# EAGLE board sterownik_led do druku (EAGLE 9.5.2)
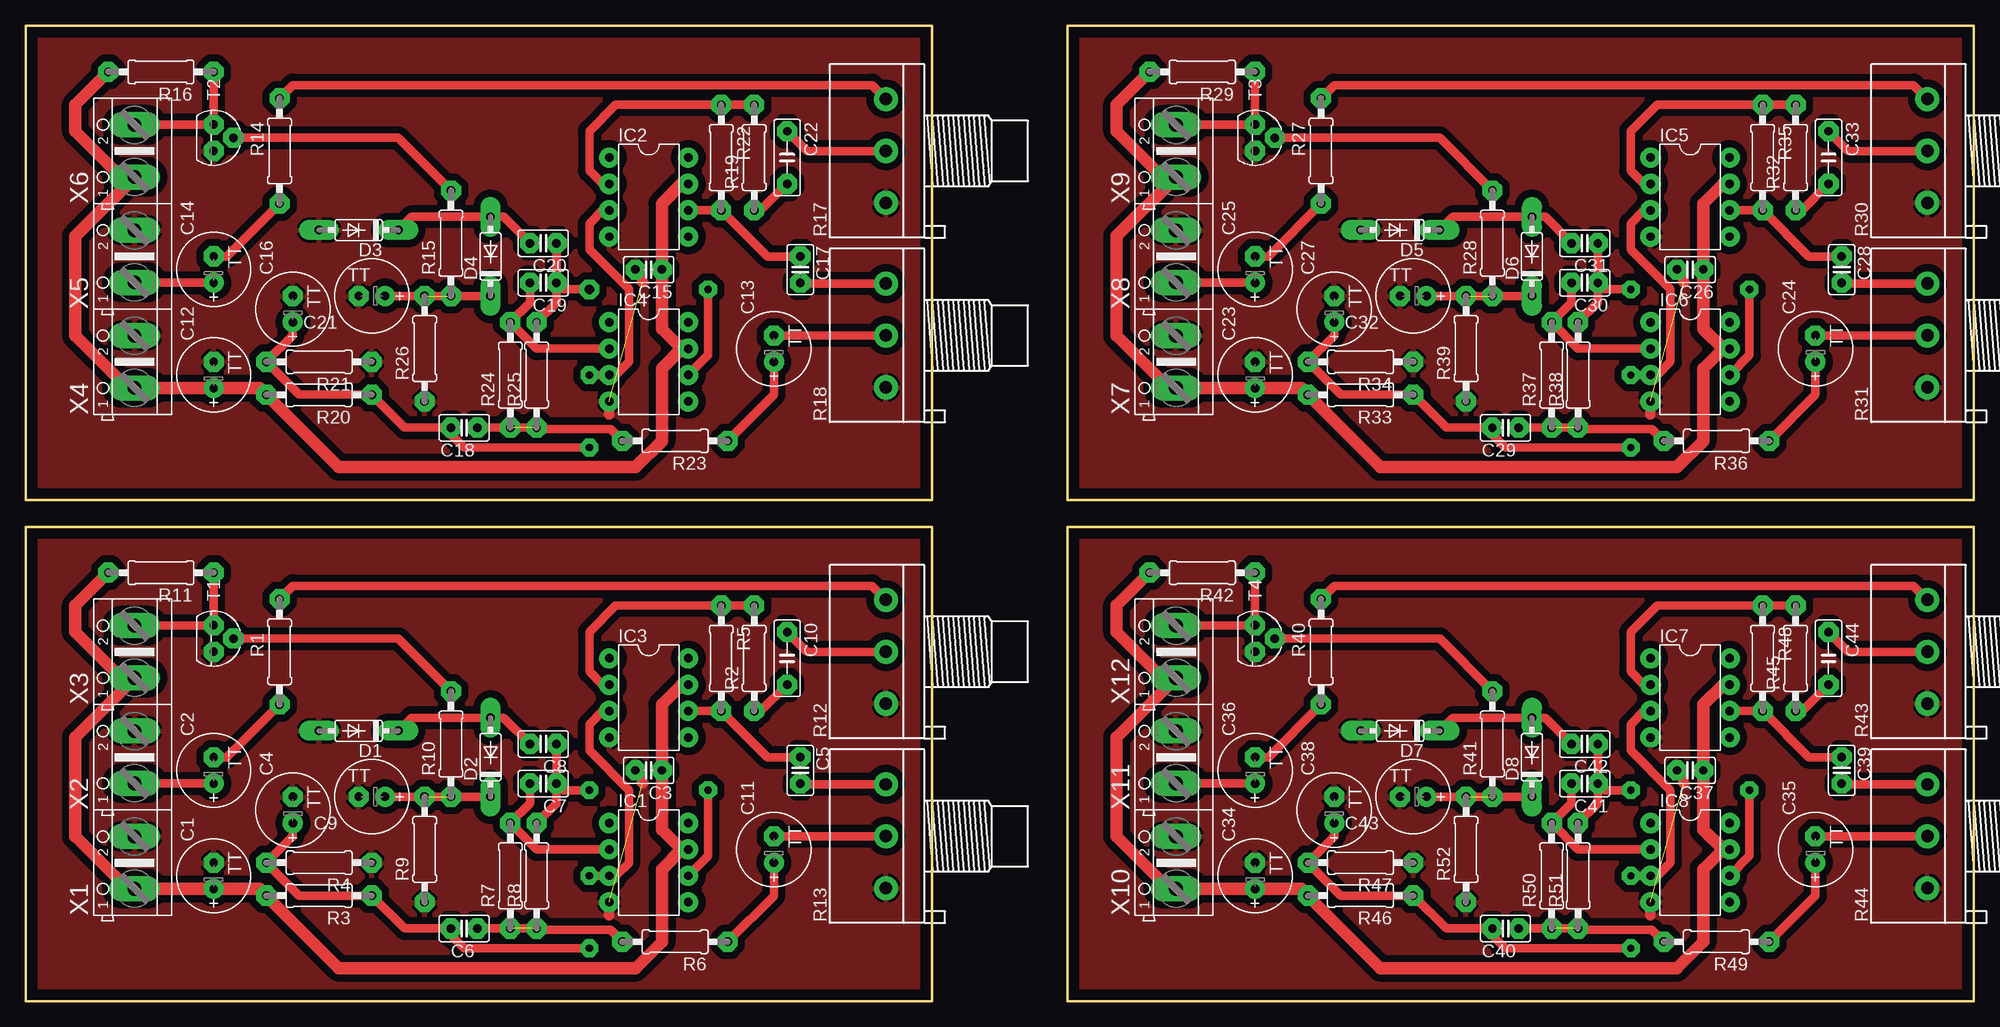
[diagram p0: board, top side]
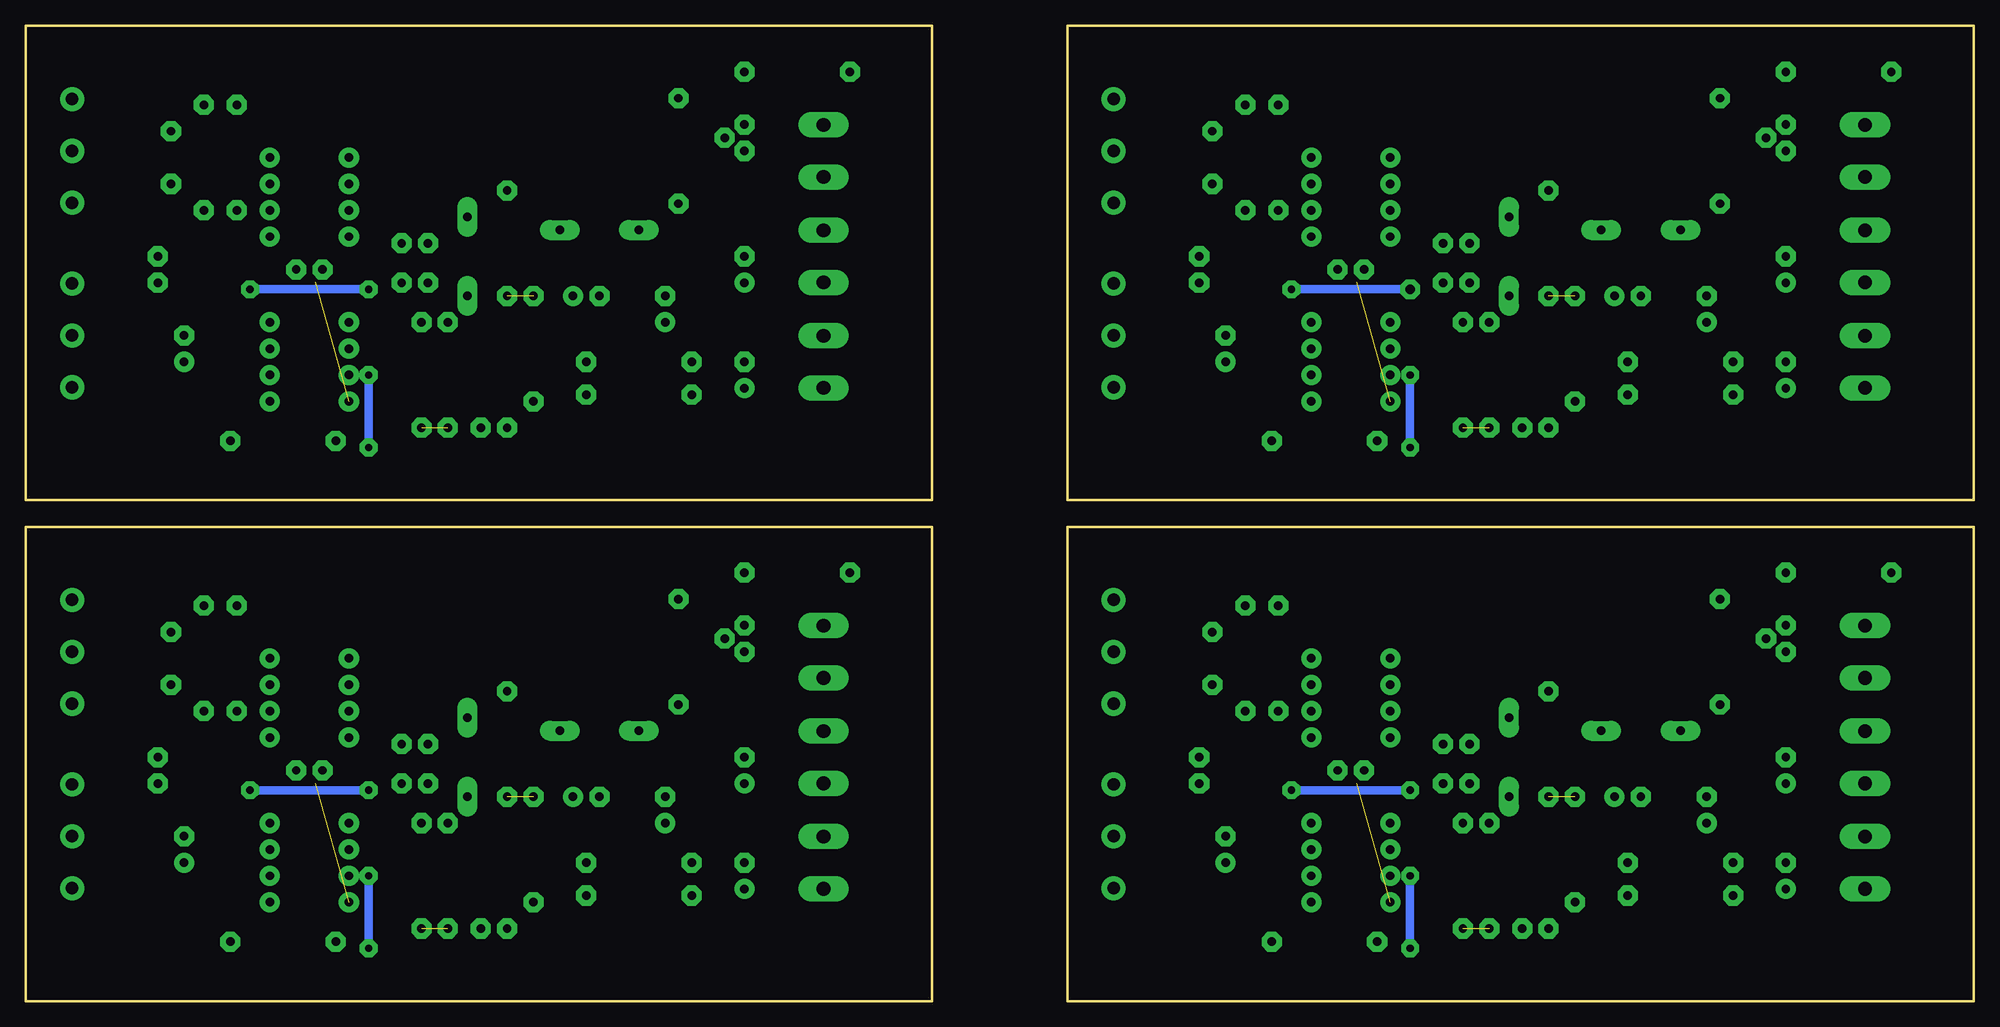
[diagram p1: board, bottom side, seen from below]

Size 187.63 x 93.96 mm. Coordinates in mm from the lower left corner, seen from the top.
Outline: 87.3,0 87.3,45.7 0,45.7 0,0 87.3,0
Outline: 87.3,48.26 87.3,93.96 0,93.96 0,48.26 87.3,48.26
Outline: 187.63,48.26 187.63,93.96 100.33,93.96 100.33,48.26 187.63,48.26
Outline: 187.63,0 187.63,45.7 100.33,45.7 100.33,0 187.63,0
Copper layers (1*16): Top 0.035mm / dielectric 1.5mm / Bottom 0.035mm
Design rules "default *": minimum track width 6mil, minimum drill 0.35mm, track to track 6mil, track to pad 6mil, pad to pad 6mil, via to via 6mil, smd to smd 6mil, copper to edge 40mil, drill to drill 6mil, minimum pad ring 22mil, minimum via ring 20mil, stop-mask expansion 4mil, vias tented up to drill 0mil, thermal gap 10mil

## Footprints (pad centres in the part's own frame; a part is rotated, then mirrored left to right if it is on the bottom)
TT2D7 = drill 0.813: + -1.27,0 | drill 0.813 octagon: - 1.27,0
C025-025X050 = drill 0.813 octagon: 1 -1.27,0; 2 1.27,0
C050-025X075 = drill 0.813 octagon: 1 -2.54,0; 2 2.54,0
DO35-7 = drill 0.813 long: A 3.81,0; C -3.81,0
DIL08 = drill 0.813 pad 1.27: 1 -3.81,-3.81; 2 -1.27,-3.81; 3 1.27,-3.81; 4 3.81,-3.81; 5 3.81,3.81; 6 1.27,3.81; 7 -1.27,3.81; 8 -3.81,3.81
0207/10 = drill 0.813 octagon: 1 -5.08,0; 2 5.08,0
3RP/1610N = drill 1.2 pad 2.184: 1 -5,0; 2 0,0; 3 5,0
TO92 = drill 0.813 octagon: 1 1.27,0; 2 0,1.905; 3 -1.27,0
AK500/2 = drill 1.321 long: 1 -2.515,0; 2 2.515,0

## Placement (x,y rotation side)
C1  470n  [TT2D7]  18.09,12.06 90 top
C2  10u  [TT2D7]  18.09,22.23 90 top
C3  100n  [C025-025X050]  60,22.23 180 top
C4  10u  [TT2D7]  25.71,18.41 90 top
C5  1u  [C025-025X050]  74.6,22.23 270 top
C6  150n  [C025-025X050]  42.22,6.99 180 top
C7  11n  [C025-025X050]  49.84,20.95 180 top
C8  2.2u  [C025-025X050]  49.84,24.77 180 top
C9  10u  [TT2D7]  33.33,19.68 180 top
C10  10u  [C050-025X075]  73.33,33.02 270 top
C11  470n  [TT2D7]  72.06,14.61 90 top
C12  470n  [TT2D7]  18.09,60.33 90 top
C13  470n  [TT2D7]  72.06,62.87 90 top
C14  10u  [TT2D7]  18.09,70.48 90 top
C15  100n  [C025-025X050]  60,70.48 180 top
C16  10u  [TT2D7]  25.71,66.67 90 top
C17  1u  [C025-025X050]  74.6,70.48 270 top
C18  150n  [C025-025X050]  42.22,55.24 180 top
C19  11n  [C025-025X050]  49.84,69.22 180 top
C20  2.2u  [C025-025X050]  49.84,73.03 180 top
C21  10u  [TT2D7]  33.33,67.94 180 top
C22  10u  [C050-025X075]  73.33,81.28 270 top
C23  470n  [TT2D7]  118.42,60.33 90 top
C24  470n  [TT2D7]  172.39,62.87 90 top
C25  10u  [TT2D7]  118.42,70.48 90 top
C26  100n  [C025-025X050]  160.32,70.48 180 top
C27  10u  [TT2D7]  126.03,66.67 90 top
C28  1u  [C025-025X050]  174.93,70.48 270 top
C29  150n  [C025-025X050]  142.54,55.24 180 top
C30  11n  [C025-025X050]  150.16,69.22 180 top
C31  2.2u  [C025-025X050]  150.16,73.03 180 top
C32  10u  [TT2D7]  133.66,67.94 180 top
C33  10u  [C050-025X075]  173.66,81.28 270 top
C34  470n  [TT2D7]  118.42,12.06 90 top
C35  470n  [TT2D7]  172.39,14.61 90 top
C36  10u  [TT2D7]  118.42,22.23 90 top
C37  100n  [C025-025X050]  160.32,22.23 180 top
C38  10u  [TT2D7]  126.03,18.41 90 top
C39  1u  [C025-025X050]  174.93,22.23 270 top
C40  150n  [C025-025X050]  142.54,6.99 180 top
C41  11n  [C025-025X050]  150.16,20.95 180 top
C42  2.2u  [C025-025X050]  150.16,24.77 180 top
C43  10u  [TT2D7]  133.66,19.68 180 top
C44  10u  [C050-025X075]  173.66,33.02 270 top
D1  1N4148DO35-7  [DO35-7]  32.05,26.04 180 top
D2  1N4148DO35-7  [DO35-7]  44.76,23.5 90 top
D3  1N4148DO35-7  [DO35-7]  32.05,74.3 180 top
D4  1N4148DO35-7  [DO35-7]  44.76,71.75 90 top
D5  1N4148DO35-7  [DO35-7]  132.38,74.3 180 top
D6  1N4148DO35-7  [DO35-7]  145.08,71.75 90 top
D7  1N4148DO35-7  [DO35-7]  132.38,26.04 180 top
D8  1N4148DO35-7  [DO35-7]  145.08,23.5 90 top
IC1  TL081P  [DIL08]  60,13.34 270 top
IC2  TL081P  [DIL08]  60,77.47 270 top
IC3  TL081P  [DIL08]  60,29.21 270 top
IC4  TL081P  [DIL08]  60,61.59 270 top
IC5  TL081P  [DIL08]  160.32,77.47 270 top
IC6  TL081P  [DIL08]  160.32,61.59 270 top
IC7  TL081P  [DIL08]  160.32,29.21 270 top
IC8  TL081P  [DIL08]  160.32,13.34 270 top
R1  470  [0207/10]  24.44,33.66 90 top
R2  2k2  [0207/10]  70.16,33.02 90 top
R3  1k  [0207/10]  28.25,10.16 180 top
R4  1k  [0207/10]  28.25,13.34 180 top
R5  100k  [0207/10]  66.98,33.02 270 top
R6  77k  [0207/10]  62.54,5.71 180 top
R7  38.4k  [0207/10]  46.66,12.06 90 top
R8  80.6k  [0207/10]  49.2,12.06 90 top
R9  5.6k  [0207/10]  38.41,14.61 90 top
R10  5.6k  [0207/10]  40.95,24.77 90 top
R11  10k  [0207/10]  13.01,41.27 180 top
R12  4.7k  [3RP/1610N]  82.86,33.66 90 top
R13  4.7k  [3RP/1610N]  82.86,15.88 90 top
R14  470  [0207/10]  24.44,81.92 90 top
R15  5.6k  [0207/10]  40.95,73.03 90 top
R16  10k  [0207/10]  13.01,89.53 180 top
R17  4.7k  [3RP/1610N]  82.86,81.92 90 top
R18  4.7k  [3RP/1610N]  82.86,64.14 90 top
R19  2k2  [0207/10]  70.16,81.28 90 top
R20  1k  [0207/10]  28.25,58.42 180 top
R21  1k  [0207/10]  28.25,61.59 180 top
R22  100k  [0207/10]  66.98,81.28 270 top
R23  77k  [0207/10]  62.54,53.98 180 top
R24  38.4k  [0207/10]  46.66,60.33 90 top
R25  80.6k  [0207/10]  49.2,60.33 90 top
R26  5.6k  [0207/10]  38.41,62.87 90 top
R27  470  [0207/10]  124.77,81.92 90 top
R28  5.6k  [0207/10]  141.27,73.03 90 top
R29  10k  [0207/10]  113.34,89.53 180 top
R30  4.7k  [3RP/1610N]  183.18,81.92 90 top
R31  4.7k  [3RP/1610N]  183.18,64.14 90 top
R32  2k2  [0207/10]  170.48,81.28 90 top
R33  1k  [0207/10]  128.57,58.42 180 top
R34  1k  [0207/10]  128.57,61.59 180 top
R35  100k  [0207/10]  167.31,81.28 270 top
R36  77k  [0207/10]  162.86,53.98 180 top
R37  38.4k  [0207/10]  146.99,60.33 90 top
R38  80.6k  [0207/10]  149.53,60.33 90 top
R39  5.6k  [0207/10]  138.73,62.87 90 top
R40  470  [0207/10]  124.77,33.66 90 top
R41  5.6k  [0207/10]  141.27,24.77 90 top
R42  10k  [0207/10]  113.34,41.27 180 top
R43  4.7k  [3RP/1610N]  183.18,33.66 90 top
R44  4.7k  [3RP/1610N]  183.18,15.88 90 top
R45  2k2  [0207/10]  170.48,33.02 90 top
R46  1k  [0207/10]  128.57,10.16 180 top
R47  1k  [0207/10]  128.57,13.34 180 top
R48  100k  [0207/10]  167.31,33.02 270 top
R49  77k  [0207/10]  162.86,5.71 180 top
R50  38.4k  [0207/10]  146.99,12.06 90 top
R51  80.6k  [0207/10]  149.53,12.06 90 top
R52  5.6k  [0207/10]  138.73,14.61 90 top
T1  BC547  [TO92]  18.09,34.92 270 top
T2  BC547  [TO92]  18.09,83.19 270 top
T3  BC547  [TO92]  118.42,83.19 270 top
T4  BC547  [TO92]  118.42,34.92 270 top
X1  [AK500/2]  10.46,13.34 90 top
X2  [AK500/2]  10.46,23.5 90 top
X3  [AK500/2]  10.46,33.66 90 top
X4  [AK500/2]  10.46,61.59 90 top
X5  [AK500/2]  10.46,71.75 90 top
X6  [AK500/2]  10.46,81.92 90 top
X7  [AK500/2]  110.8,61.59 90 top
X8  [AK500/2]  110.8,71.75 90 top
X9  [AK500/2]  110.8,81.92 90 top
X10  [AK500/2]  110.8,13.34 90 top
X11  [AK500/2]  110.8,23.5 90 top
X12  [AK500/2]  110.8,33.66 90 top

## Library data of the parts
C1-C44 = rcl; SPICEPREFIX: C
D1-D8 = diode
IC1-IC8 = linear
R1-R11 R14-R16 R19-R29 R32-R42 R45-R52 = rcl; SPICEPREFIX: R
R12 R13 R17 R18 R30 R31 R43 R44 = pot
T1-T4 = transistor
X1-X12 = con-ptr500; OC_FARNELL: unknown; OC_NEWARK: unknown

## Nets
0: C1.- C3.2 C4.- C9.- D1.A IC1.4 IC3.4 R4.1 R9.1 R12.1 R13.1 T1.1 X1.2 X2.2
1: C12.- C15.2 C16.- C21.- D3.A IC2.4 IC4.4 R17.1 R18.1 R21.1 R26.1 T2.1 X4.2 X5.2
2: C23.- C26.2 C27.- C32.- D5.A IC5.4 IC6.4 R30.1 R31.1 R34.1 R39.1 T3.1 X7.2 X8.2
3: C34.- C37.2 C38.- C43.- D7.A IC7.4 IC8.4 R43.1 R44.1 R47.1 R52.1 T4.1 X10.2 X11.2
JACK_VIN: C2.+ X2.1
JACK_VIN1: C14.+ X5.1
JACK_VIN2: C25.+ X8.1
JACK_VIN3: C36.+ X11.1
N$1: C4.+ C6.2 IC1.3 IC3.3 R3.1 R4.2
N$2: R10.2 T1.2
N$3: C10.1 R12.2
N$4: C2.- R1.1
N$5: R1.2 R12.3
N$6: C7.2 IC1.2 R7.2
N$7: C14.- R14.1
N$8: C11.- R13.2
N$9: C5.1 IC3.6 R5.2
N$10: C6.1 R6.2 R7.1 R8.1
N$11: C17.1 IC2.6 R22.2
N$12: C7.1 C8.1 IC1.6 R8.2
N$13: C18.1 R23.2 R24.1 R25.1
N$14: C20.2 D3.C D4.A
N$15: C21.+ D4.C R15.1 R26.2
N$16: C8.2 D1.C D2.A
N$17: C9.+ D2.C R9.2 R10.1
N$18: C5.2 R13.3
N$19: C10.2 R2.1
N$20: C11.+ R6.1
N$21: IC3.2 R2.2 R5.1
N$22: R15.2 T2.2
N$23: R14.2 R17.3
N$24: C22.2 R19.1
N$25: C17.2 R18.3
N$26: C16.+ C18.2 IC2.3 IC4.3 R20.1 R21.2
N$27: C13.- R18.2
N$28: C13.+ R23.1
N$29: IC2.2 R19.2 R22.1
N$30: C19.2 IC4.2 R24.2
N$31: C19.1 C20.1 IC4.6 R25.2
N$32: C22.1 R17.2
N$33: C25.- R27.1
N$34: C28.1 IC5.6 R35.2
N$35: C29.1 R36.2 R37.1 R38.1
N$36: C31.2 D5.C D6.A
N$37: C32.+ D6.C R28.1 R39.2
N$38: R28.2 T3.2
N$39: R27.2 R30.3
N$40: C33.2 R32.1
N$41: C28.2 R31.3
N$42: C27.+ C29.2 IC5.3 IC6.3 R33.1 R34.2
N$43: C24.- R31.2
N$44: C24.+ R36.1
N$45: IC5.2 R32.2 R35.1
N$46: C30.2 IC6.2 R37.2
N$47: C30.1 C31.1 IC6.6 R38.2
N$48: C33.1 R30.2
N$49: C36.- R40.1
N$50: C39.1 IC7.6 R48.2
N$51: C40.1 R49.2 R50.1 R51.1
N$52: C42.2 D7.C D8.A
N$53: C43.+ D8.C R41.1 R52.2
N$54: R41.2 T4.2
N$55: R40.2 R43.3
N$56: C44.2 R45.1
N$57: C39.2 R44.3
N$58: C38.+ C40.2 IC7.3 IC8.3 R46.1 R47.2
N$59: C35.- R44.2
N$60: C35.+ R49.1
N$61: IC7.2 R45.2 R48.1
N$62: C41.2 IC8.2 R50.2
N$63: C41.1 C42.1 IC8.6 R51.2
N$64: C44.1 R43.2
OUT: R11.1 T1.3 X3.2
OUT1: R16.1 T2.3 X6.2
OUT2: R29.1 T3.3 X9.2
OUT3: R42.1 T4.3 X12.2
VCC: C1.+ C3.1 IC1.7 IC3.7 R3.2 R11.2 X1.1 X3.1
VCC1: C12.+ C15.1 IC2.7 IC4.7 R16.2 R20.2 X4.1 X6.1
VCC2: C23.+ C26.1 IC5.7 IC6.7 R29.2 R33.2 X7.1 X9.1
VCC3: C34.+ C37.1 IC7.7 IC8.7 R42.2 R46.2 X10.1 X12.1

## Tracks (layer width: path | path; a pad name or v marks a point on that pad's centre or on a via)
0  (1 unrouted)
  Top 0.8: 10.46,26.04 X2.2
  Top 1: C3.2 59.36,21.59 59.36,21.03 59.4,20.99 | IC1.4 56.19,8.26
  pour Top (isolate 0.7): -0.33,45.72 87.3,45.72 87.3,0 -0.33,0
1  (1 unrouted)
  Top 0.8: 10.46,74.3 X5.2
  Top 1: C15.2 59.36,69.85 59.36,69.29 59.4,69.25 | IC4.4 56.19,56.52
  pour Top (isolate 0.7): -0.33,93.98 87.3,93.98 87.3,48.26 -0.33,48.26
2  (1 unrouted)
  Top 0.8: 110.8,74.3 X8.2
  Top 1: C26.2 159.69,69.85 159.69,69.29 159.73,69.25 | IC6.4 156.51,56.52
  pour Top (isolate 0.7): 100,93.98 187.63,93.98 187.63,48.26 100,48.26
3  (1 unrouted)
  Top 0.8: 110.8,26.04 X11.2
  Top 1: C37.2 159.69,21.59 159.69,21.03 159.73,20.99 | IC8.4 156.51,8.26
  pour Top (isolate 0.7): 100,45.72 187.63,45.72 187.63,0 100,0
JACK_VIN
  Top 0.8: X2.1 10.49,20.95 C2.+
JACK_VIN1
  Top 0.8: X5.1 10.49,69.22 C14.+
JACK_VIN2
  Top 0.8: X8.1 110.82,69.22 C25.+
JACK_VIN3
  Top 0.8: X11.1 110.82,20.95 C36.+
N$1  (via drill 0.7)
  Top 0.8: C4.+ 25.71,15.88 R4.2 26.34,10.16 R3.1 36.5,6.99 C6.2 40.95,6.35 42.22,5.08 v54.28,5.08 | v54.28,12.06 IC1.3 56.82,12.06 58.09,13.34 58.09,20.32 54.28,24.13 54.28,26.67 55.55,27.94 IC3.3
  Bottom 0.8: v54.28,12.06 v54.28,5.08
N$2
  Top 0.8: T1.2 35.87,34.92 R10.2
N$3
  Top 0.8: R12.2 75.23,33.66 C10.1
N$4
  Top 0.8: R1.1 19.36,23.5 C2.-
N$5
  Top 0.8: R1.2 25.71,40.01 81.5,40.01 R12.3
N$6
  Top 0.8: C7.2 48.57,19.05 R7.2 49.2,14.61 IC1.2
N$7
  Top 0.8: R14.1 19.36,71.75 C14.-
N$8
  Top 0.8: R13.2 C11.-
N$9
  Top 0.8: C5.1 71.42,23.5 R5.2 IC3.6
N$10  (1 unrouted)
  Top 0.8: C6.1 R8.1 49.33,6.86 56.31,6.86 R6.2
N$11
  Top 0.8: C17.1 71.42,71.75 R22.2 IC2.6
N$12  (via drill 0.7)
  Top 0.8: C7.1 51.11,19.05 R8.2 | C8.1 C7.1 | IC1.6 65.71,13.97 v65.71,20.32 | v54.28,20.32 51.74,20.32 C7.1
  Bottom 0.8: v65.71,20.32 v54.28,20.32
N$13  (1 unrouted)
  Top 0.8: C18.1 R25.1 49.33,55.12 56.31,55.12 R23.2
N$14
  Top 0.8: D3.C 37.14,75.56 D4.A 46.02,75.56 C20.2
N$15  (1 unrouted)
  Top 0.8: C21.+ R26.2 D4.C
N$16
  Top 0.8: D1.C 37.14,27.3 D2.A 46.02,27.3 C8.2
N$17  (1 unrouted)
  Top 0.8: C9.+ R9.2 D2.C
N$18
  Top 0.8: R13.3 74.68,20.88 C5.2
N$19
  Top 0.8: C10.2 70.79,27.94 R2.1
N$20
  Top 0.8: R6.1 72.06,10.16 C11.+
N$21
  Top 0.8: R2.2 R5.1 56.82,38.1 54.28,35.56 54.28,31.75 55.55,30.48 IC3.2
N$22
  Top 0.8: T2.2 35.87,83.19 R15.2
N$23
  Top 0.8: R14.2 25.71,88.27 81.5,88.27 R17.3
N$24
  Top 0.8: C22.2 70.79,76.2 R19.1
N$25
  Top 0.8: R18.3 74.68,69.14 C17.2
N$26  (via drill 0.7)
  Top 0.8: C16.+ 25.71,64.14 R21.2 26.34,58.42 R20.1 36.5,55.24 C18.2 40.95,54.61 42.22,53.34 v54.28,53.34 | v54.28,60.33 IC4.3 56.82,60.33 58.09,61.59 58.09,68.58 54.28,72.39 54.28,74.93 55.55,76.2 IC2.3
  Bottom 0.8: v54.28,60.33 v54.28,53.34
N$27
  Top 0.8: R18.2 C13.-
N$28
  Top 0.8: R23.1 72.06,58.42 C13.+
N$29
  Top 0.8: R19.2 R22.1 56.82,86.36 54.28,83.82 54.28,80.01 55.55,78.74 IC2.2
N$30
  Top 0.8: C19.2 48.57,67.31 R24.2 49.2,62.87 IC4.2
N$31  (via drill 0.7, 0.89)
  Top 0.8: C19.1 51.11,67.31 R25.2 | C20.1 C19.1 | IC4.6 65.71,62.23 v65.71,68.58 | v54.28,68.58 51.74,68.58 C19.1
  Bottom 0.8: v65.71,68.58 v54.28,68.58
N$32
  Top 0.8: R17.2 75.23,81.92 C22.1
N$33
  Top 0.8: R27.1 119.69,71.75 C25.-
N$34
  Top 0.8: C28.1 171.75,71.75 R35.2 IC5.6
N$35  (1 unrouted)
  Top 0.8: C29.1 R38.1 149.66,55.12 156.64,55.12 R36.2
N$36
  Top 0.8: D5.C 137.46,75.56 D6.A 146.35,75.56 C31.2
N$37  (1 unrouted)
  Top 0.8: C32.+ R39.2 D6.C
N$38
  Top 0.8: T3.2 136.19,83.19 R28.2
N$39
  Top 0.8: R27.2 126.03,88.27 181.83,88.27 R30.3
N$40
  Top 0.8: C33.2 171.12,76.2 R32.1
N$41
  Top 0.8: R31.3 175.01,69.14 C28.2
N$42  (via drill 0.7)
  Top 0.8: C27.+ 126.03,64.14 R34.2 126.67,58.42 R33.1 136.83,55.24 C29.2 141.27,54.61 142.54,53.34 v154.61,53.34 | v154.61,60.33 IC6.3 157.15,60.33 158.42,61.59 158.42,68.58 154.61,72.39 154.61,74.93 155.88,76.2 IC5.3
  Bottom 0.8: v154.61,60.33 v154.61,53.34
N$43
  Top 0.8: R31.2 C24.-
N$44
  Top 0.8: R36.1 172.39,58.42 C24.+
N$45
  Top 0.8: R32.2 R35.1 157.15,86.36 154.61,83.82 154.61,80.01 155.88,78.74 IC5.2
N$46
  Top 0.8: C30.2 148.89,67.31 R37.2 149.53,62.87 IC6.2
N$47  (via drill 0.7)
  Top 0.8: C30.1 151.43,67.31 R38.2 | C31.1 C30.1 | IC6.6 166.04,62.23 v166.04,68.58 | v154.61,68.58 152.07,68.58 C30.1
  Bottom 0.8: v166.04,68.58 v154.61,68.58
N$48
  Top 0.8: R30.2 175.56,81.92 C33.1
N$49
  Top 0.8: R40.1 119.69,23.5 C36.-
N$50
  Top 0.8: C39.1 171.75,23.5 R48.2 IC7.6
N$51  (1 unrouted)
  Top 0.8: C40.1 R51.1 149.66,6.86 156.64,6.86 R49.2
N$52
  Top 0.8: D7.C 137.46,27.3 D8.A 146.35,27.3 C42.2
N$53  (1 unrouted)
  Top 0.8: C43.+ R52.2 D8.C
N$54
  Top 0.8: T4.2 136.19,34.92 R41.2
N$55
  Top 0.8: R40.2 126.03,40.01 181.83,40.01 R43.3
N$56
  Top 0.8: C44.2 171.12,27.94 R45.1
N$57
  Top 0.8: R44.3 175.01,20.88 C39.2
N$58  (via drill 0.7)
  Top 0.8: C38.+ 126.03,15.88 R47.2 126.67,10.16 R46.1 136.83,6.99 C40.2 141.27,6.35 142.54,5.08 v154.61,5.08 | v154.61,12.06 IC8.3 157.15,12.06 158.42,13.34 158.42,20.32 154.61,24.13 154.61,26.67 155.88,27.94 IC7.3
  Bottom 0.8: v154.61,12.06 v154.61,5.08
N$59
  Top 0.8: R44.2 C35.-
N$60
  Top 0.8: R49.1 172.39,10.16 C35.+
N$61
  Top 0.8: R45.2 R48.1 157.15,38.1 154.61,35.56 154.61,31.75 155.88,30.48 IC7.2
N$62
  Top 0.8: C41.2 148.89,19.05 R50.2 149.53,14.61 IC8.2
N$63  (via drill 0.7)
  Top 0.8: C41.1 151.43,19.05 R51.2 | C42.1 C41.1 | IC8.6 166.04,13.97 v166.04,20.32 | v154.61,20.32 152.07,20.32 C41.1
  Bottom 0.8: v166.04,20.32 v154.61,20.32
N$64
  Top 0.8: R43.2 175.56,33.66 C44.1
OUT
  Top 0.8: X3.2 10.49,36.2 T1.3 R11.1
OUT1
  Top 0.8: X6.2 10.49,84.45 T2.3 R16.1
OUT2
  Top 0.8: X9.2 110.82,84.45 T3.3 R29.1
OUT3
  Top 0.8: X12.2 110.82,36.2 T4.3 R42.1
VCC
  Top 0.635: X3.1 5.38,26.06
  Top 1.2: X1.1 10.49,10.79 | X1.1 18.06,10.82 C1.+ 22.53,10.79 R3.2 30.15,3.17 58.73,3.17 61.27,5.71 61.27,12.7 63.17,14.61 | 63.17,14.61 IC1.7 | 63.17,14.61 61.27,16.51 C3.1 61.27,28.57 63.17,30.48 IC3.7 | X1.1 9.8,10.82 4.75,15.88 4.75,25.43 X3.1 9.17,31.14 4.75,35.56 4.75,38.1 R11.2
VCC1
  Top 0.635: X6.1 5.38,74.32
  Top 1.2: X4.1 10.49,59.05 | X4.1 18.06,59.08 C12.+ 22.53,59.05 R20.2 30.15,51.44 58.73,51.44 61.27,53.98 61.27,60.96 63.17,62.87 | 63.17,62.87 IC4.7 | 63.17,62.87 61.27,64.77 C15.1 61.27,76.83 63.17,78.74 IC2.7 | X4.1 9.8,59.08 4.75,64.14 4.75,73.69 X6.1 9.17,79.4 4.75,83.82 4.75,86.36 R16.2
VCC2
  Top 0.635: X9.1 105.72,74.32
  Top 1.2: X7.1 110.82,59.05 | X7.1 118.39,59.08 C23.+ 122.86,59.05 R33.2 130.48,51.44 159.05,51.44 161.59,53.98 161.59,60.96 163.5,62.87 | 163.5,62.87 IC6.7 | 163.5,62.87 161.59,64.77 C26.1 161.59,76.83 163.5,78.74 IC5.7 | X7.1 110.14,59.08 105.08,64.14 105.08,73.69 X9.1 109.5,79.4 105.08,83.82 105.08,86.36 R29.2
VCC3
  Top 0.635: X12.1 105.72,26.06
  Top 1.2: X10.1 110.82,10.79 | X10.1 118.39,10.82 C34.+ 122.86,10.79 R46.2 130.48,3.17 159.05,3.17 161.59,5.71 161.59,12.7 163.5,14.61 | 163.5,14.61 IC8.7 | 163.5,14.61 161.59,16.51 C37.1 161.59,28.57 163.5,30.48 IC7.7 | X10.1 110.14,10.82 105.08,15.88 105.08,25.43 X12.1 109.5,31.14 105.08,35.56 105.08,38.1 R42.2